# EAGLE board Software Switch Module (EAGLE 7.7.0)
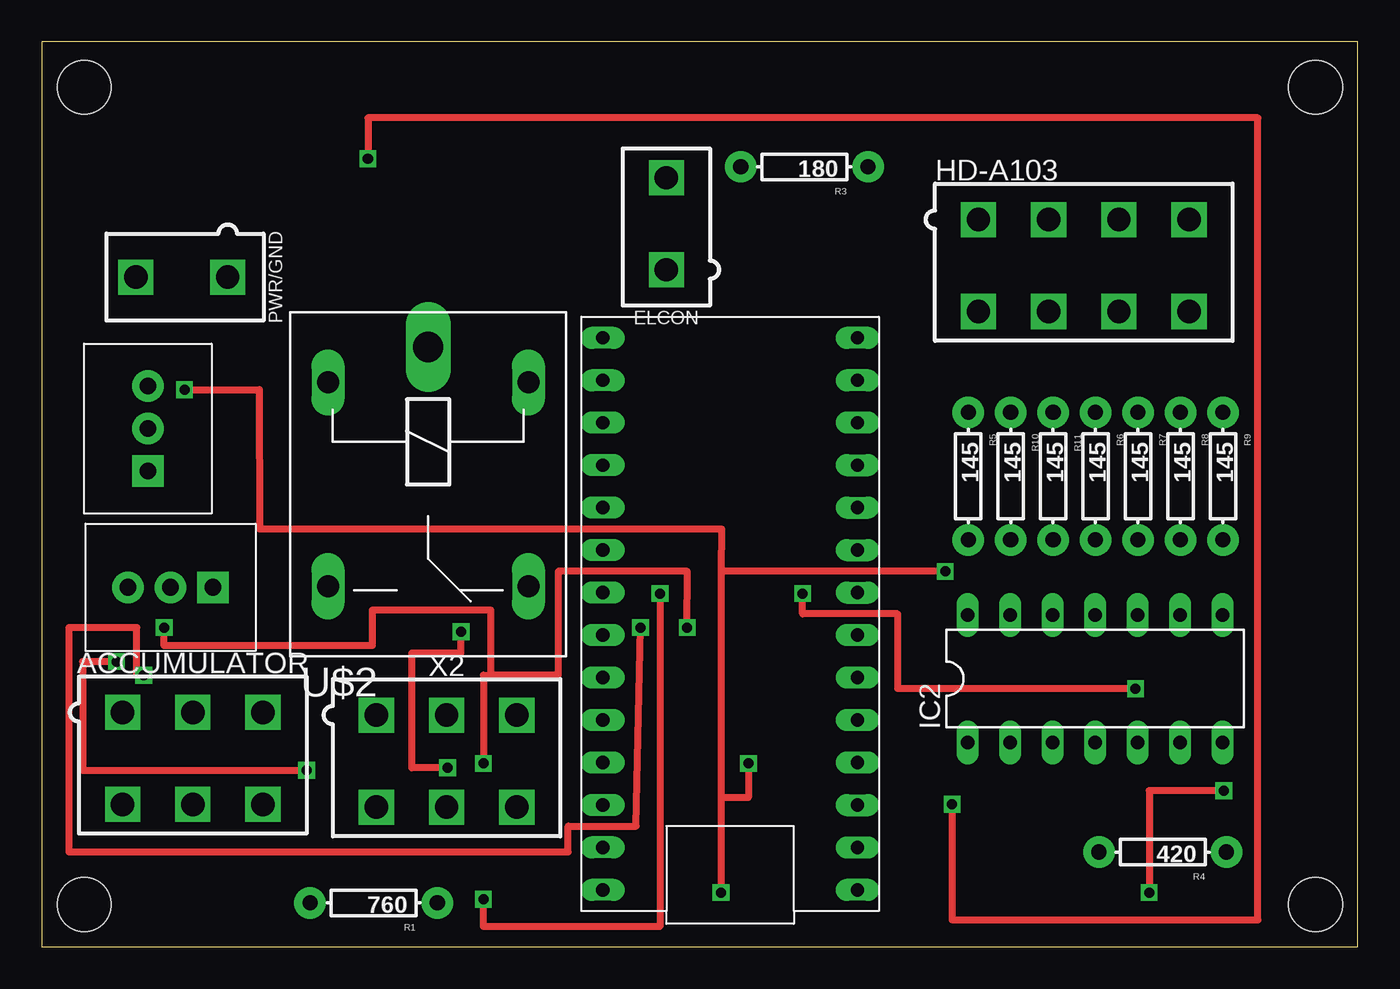
[diagram p0: board, top side]
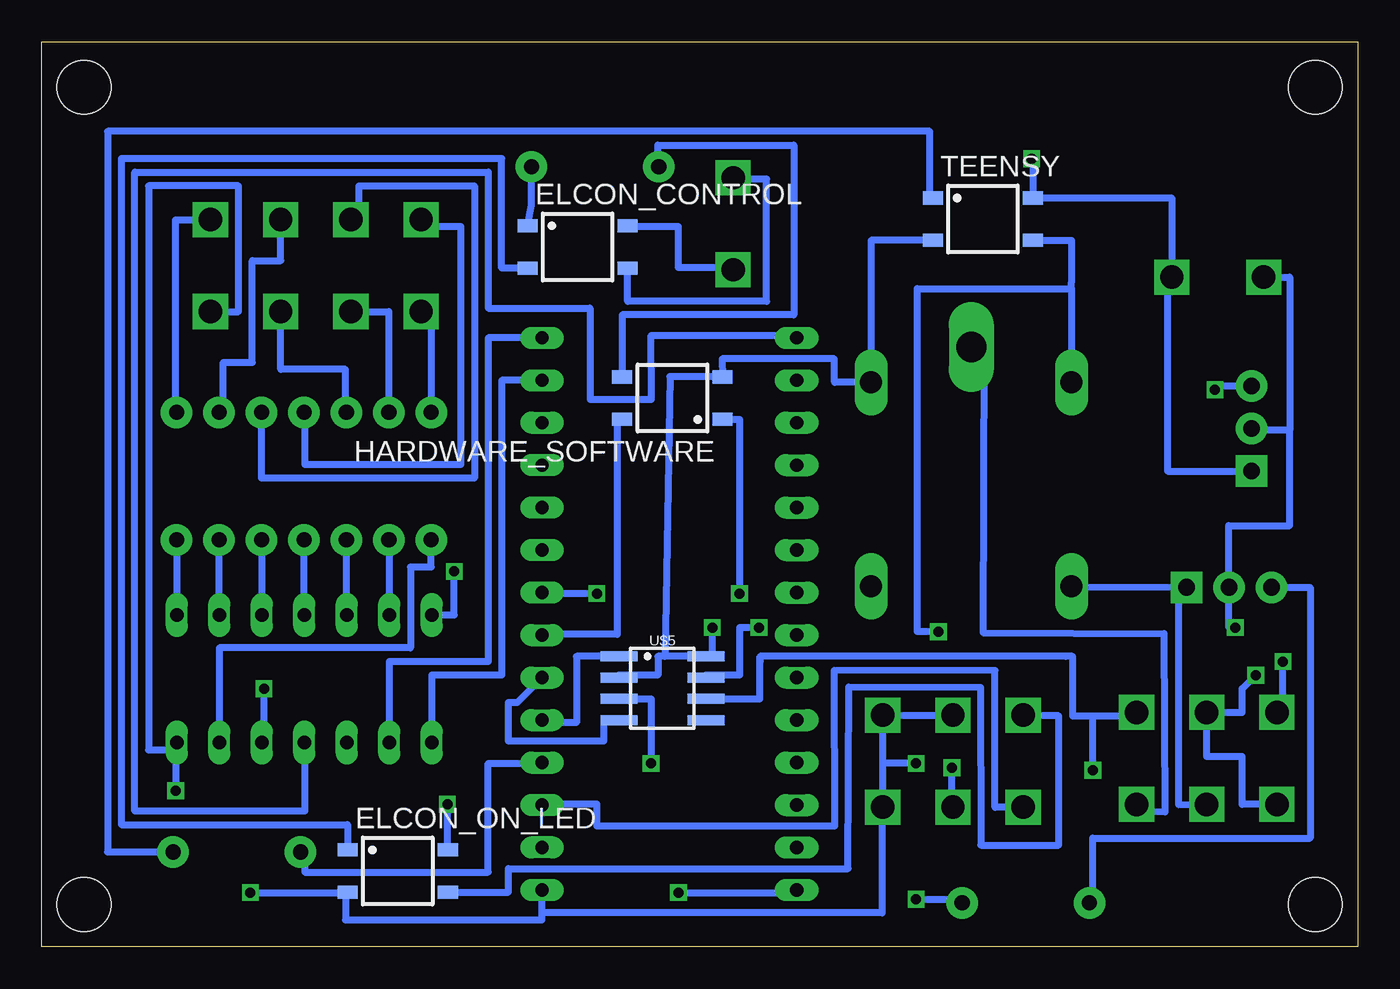
[diagram p1: board, bottom side, seen from below]

Size 78.72 x 54.13 mm. Coordinates in mm from the lower left corner, seen from the top.
Outline: 0,0 78.72,0 78.72,54.13 0,54.13 0,0
Copper layers (1*16): Top 0.035mm / dielectric 1.5mm / Bottom 0.035mm
Design rules "default *": minimum track width 0.00040625mm, minimum drill 24mil, track to track 16mil, track to pad 16mil, pad to pad 16mil, via to via 16mil, smd to smd 8mil, copper to edge 40mil, drill to drill 8mil, minimum pad ring 10mil, minimum via ring 8mil, stop-mask expansion 4mil, vias tented up to drill 0mil, thermal gap 10mil
Holes 3.2 mm at 2.54,2.54 2.54,51.41 76.2,51.41 76.2,2.54

## Footprints (pad centres in the part's own frame; a part is rotated, then mirrored left to right if it is on the bottom)
MINIFIT_5566-6 = drill 1.4 square: 1 4.2,-2.75; 2 0,-2.75; 3 -4.2,-2.75; 4 4.2,2.75; 5 0,2.75; 6 -4.2,2.75
MINIFIT_5566-2 = drill 1.4 square: 1 0,-2.75; 2 0,2.75
SOP04 = smd 0.8 x 1.2: 1 -1.27,-3; 2 1.27,-3; 3 1.27,3; 4 -1.27,3
MINIFIT_5566-8 = drill 1.4 square: 1 6.3,-2.75; 2 2.1,-2.75; 3 -2.1,-2.75; 4 -6.3,-2.75; 5 6.3,2.75; 6 2.1,2.75; 7 -2.1,2.75; 8 -6.3,2.75
TO-220 = drill 1 pad 1.88 square: 1 -2.54,0 | drill 1 pad 1.88: 2 0,0; 3 2.54,0
DIL14 = drill 0.813 long: 1 -7.62,-3.81; 2 -5.08,-3.81; 3 -2.54,-3.81; 4 0,-3.81; 5 2.54,-3.81; 6 5.08,-3.81; 7 7.62,-3.81; 8 7.62,3.81; 9 5.08,3.81; 10 2.54,3.81; 11 0,3.81; 12 -2.54,3.81; 13 -5.08,3.81; 14 -7.62,3.81
AXIAL-0.3 = drill 0.9 pad 1.88: P$1 -3.81,0; P$2 3.81,0
AXIAL-0.3EZ = drill 0.9 pad 1.88: P$1 -3.81,0; P$2 3.81,0
TEENSY_3.2_SIMPLE = drill 0.8 long: 3.3V 16.51,29.21; A0 16.51,3.81; A1 16.51,6.35; A2 16.51,8.89; A3 16.51,11.43; A4 16.51,13.97; A5 16.51,16.51; A6 16.51,19.05; A7 16.51,21.59; A8 16.51,24.13; A9 16.51,26.67; AGND 16.51,31.75; D0(RX1) 1.27,31.75; D1(TX1) 1.27,29.21; D2 1.27,26.67; D3(CANTX) 1.27,24.13; D4(CANRX) 1.27,21.59; D5 1.27,19.05; D6 1.27,16.51; D7(RX3) 1.27,13.97; D8(TX3) 1.27,11.43; D9(RX2) 1.27,8.89; D10(TX2) 1.27,6.35; D11 1.27,3.81; D12 1.27,1.27; D13 16.51,1.27; GND 1.27,34.29; VIN 16.51,34.29
ZF112 = drill 1.321 long: 1 4.064,14.884; 2 4.064,2.896; O 16.256,14.884; S 16.256,2.896 | drill 1.803 long: P 1.956,8.89
SOIC-08 = smd 0.6 x 2.2: 1 -1.905,-2.6; 2 -0.635,-2.6; 3 0.635,-2.6; 4 1.905,-2.6; 5 1.905,2.6; 6 0.635,2.6; 7 -0.635,2.6; 8 -1.905,2.6

## Placement (x,y rotation side)
ACCUMULATOR  CONNECTOR-6  [MINIFIT_5566-6]  9.03,11.28 180 top
ELCON  MINIFIT_5566-2  [MINIFIT_5566-2]  37.36,43.25 0 top
ELCON_CONTROL  CPC1002N  [SOP04]  46.67,41.86 270 bottom
ELCON_ON_LED  CPC1002N  [SOP04]  57.43,4.54 270 bottom
HARDWARE_SOFTWARE  CPC1002N  [SOP04]  41,32.82 90 bottom
HD-A103  MINIFIT_5566-8  [MINIFIT_5566-8]  62.33,40.75 180 top
IC1  [TO-220]  6.34,31 90 top
IC2  74LS49N  [DIL14]  63.02,16.04 0 top
IC3  [TO-220]  7.7,21.5 180 top
PWR/GND  MINIFIT_5566-2  [MINIFIT_5566-2]  8.37,40.05 90 top
R1  760  [AXIAL-0.3]  19.85,2.64 180 top
R3  180  [AXIAL-0.3EZ]  45.62,46.65 180 top
R4  420  [AXIAL-0.3EZ]  67.05,5.68 180 top
R5  145  [AXIAL-0.3EZ]  55.42,28.16 270 top
R6  145  [AXIAL-0.3EZ]  63.04,28.16 270 top
R7  145  [AXIAL-0.3EZ]  65.58,28.16 270 top
R8  145  [AXIAL-0.3EZ]  68.12,28.16 270 top
R9  145  [AXIAL-0.3EZ]  70.66,28.16 270 top
R10  145  [AXIAL-0.3EZ]  57.96,28.16 270 top
R11  145  [AXIAL-0.3EZ]  60.5,28.16 270 top
TEENSY  CPC1002N  [SOP04]  22.42,43.53 270 bottom
U$1  TEENSY_3.2_SIMPLE  [TEENSY_3.2_SIMPLE]  50.07,37.7 180 top
U$2  G5LE  [ZF112]  14.23,37.83 270 top
U$5  MCP2551  [SOIC-08]  41.59,15.47 270 bottom
X2  CONNECTOR-6  [MINIFIT_5566-6]  24.22,11.11 180 top

## Library data of the parts
ACCUMULATOR X2 = HyTechDevices; MPN: 95566-61002; OC_FARNELL: unknown; OC_NEWARK: 22K8620
ELCON PWR/GND = HyTechDevices; OC_FARNELL: 1822072; OC_NEWARK: unknown
ELCON_CONTROL ELCON_ON_LED HARDWARE_SOFTWARE IC1 IC3 R1 R3-R11 TEENSY U$1 U$2 U$5 = HyTechDevices
HD-A103 = HyTechDevices; OC_FARNELL: unknown; OC_NEWARK: unknown
IC2 = 74xx-us

## Nets
+5V: IC1.3 IC2.14 U$1.VIN U$5.3
+12V: ELCON_ON_LED.4 IC1.1 PWR/GND.1 TEENSY.4
AIRS: ACCUMULATOR.5 IC3.1 U$2.S
GND: ELCON_ON_LED.2 HARDWARE_SOFTWARE.2 HD-A103.8 IC1.2 IC2.7 IC3.2 PWR/GND.2 TEENSY.2 U$1.GND U$2.1 U$5.2 U$5.8 X2.2 X2.3 X2.6
N$1: R4.P$1 TEENSY.1
N$2: HARDWARE_SOFTWARE.1 R1.P$1
N$3: HARDWARE_SOFTWARE.4 U$1.D5
N$4: ACCUMULATOR.6 U$2.P
N$5: IC3.3 R1.P$2
N$7: ELCON_CONTROL.1 R3.P$1
N$8: ELCON.1 ELCON_CONTROL.4
N$9: ELCON.2 ELCON_CONTROL.3
N$11: U$1.D1(TX1) X2.4
N$15: U$1.D4(CANRX) U$5.4
N$16: R4.P$2 U$1.D2
N$18: U$1.D3(CANTX) U$5.1
N$19: ACCUMULATOR.1 ACCUMULATOR.3 U$5.6
N$20: TEENSY.3 U$2.2 X2.5
N$21: IC2.11 R6.P$2
N$23: HARDWARE_SOFTWARE.3 R3.P$2
N$28: ELCON_CONTROL.2 ELCON_ON_LED.1
N$30: ELCON_ON_LED.3 X2.1
N$32: IC2.5 U$1.D6
N$33: IC2.1 U$1.D11
N$34: IC2.4 U$1.D13
N$35: IC2.2 U$1.D12
N$36: IC2.10 R7.P$2
N$37: IC2.9 R8.P$2
N$38: IC2.8 R9.P$2
N$39: IC2.13 R10.P$2
N$40: IC2.12 R11.P$2
N$41: IC2.6 R5.P$2
N$42: HD-A103.1 R6.P$1
N$43: ACCUMULATOR.2 ACCUMULATOR.4 U$5.7
N$44: HD-A103.2 R7.P$1
N$45: HD-A103.3 R8.P$1
N$46: HD-A103.4 R9.P$1
N$47: HD-A103.5 R5.P$1
N$48: HD-A103.6 R10.P$1
N$49: HD-A103.7 R11.P$1

## Tracks (layer width: path | path; a pad name or v marks a point on that pad's centre or on a via)
+5V  (via drill 0.6)
  Top 0.406: v42.27,10.97 42.27,8.94 40.64,8.94 | v54.04,22.45 40.63,22.45 | 40.63,22.45 40.64,8.94 | v8.53,33.33 13.01,33.33 13.03,24.99 40.67,24.99 40.63,22.45 | 40.64,8.94 v40.64,3.25
  Bottom 0.406: U$5.3 42.27,14.84 v42.27,10.97 | IC2.14 54.05,19.86 v54.04,22.45 | IC1.3 8.53,33.54 v8.53,33.33 | v40.64,3.25 33.55,3.25 U$1.VIN
+12V  (via drill 0.6)
  Top 0.406: v54.46,8.53 54.46,1.63 72.75,1.63 72.75,49.58 19.51,49.58 v19.51,47.14
  Bottom 0.406: IC1.1 6.34,28.45 11.38,28.45 11.38,40.05 PWR/GND.1 11.12,44.8 TEENSY.4 19.42,47.14 v19.51,47.14 | ELCON_ON_LED.4 54.46,5.81 v54.46,8.53
AIRS
  Bottom 0.406: 10.72,21.48 17.12,21.5 U$2.S | IC3.1 10.72,21.48 | 10.72,21.48 10.72,8.51 ACCUMULATOR.5
GND  (via drill 0.6)
  Top 0.406: v70.71,9.35 66.24,9.35 v66.24,3.25 | v38.61,19.1 38.62,22.45 30.89,22.45 30.89,16.26 26.87,16.26 | v7.32,19.1 7.32,18.03 19.77,18.03 19.77,20.14 26.87,20.14 26.87,16.26 | v26.42,10.97 26.42,16.26 26.87,16.26
  Bottom 0.406: HD-A103.8 66.94,38 66.94,45.52 72.34,45.52 72.34,11.79 70.71,11.79 | IC2.7 70.64,11.79 70.71,11.79 | 28.42,10.97 X2.6 28.45,8.36 28.45,2.03 48.8,2.03 | 28.42,10.97 X2.3 X2.2 | 4.06,30.89 4.06,25.2 7.72,25.2 7.72,21.5 IC3.2 7.7,19.1 v7.32,19.1 | 4.06,30.89 6.34,30.89 IC1.2 | PWR/GND.2 4.06,40.05 4.06,30.89 | TEENSY.2 29.11,42.26 U$2.1 31.29,33.77 31.31,35.16 38.02,35.16 HARDWARE_SOFTWARE.2 41.14,34.1 41.45,17.38 | 41.45,17.38 U$5.8 38.61,17.38 v38.61,19.1 | 41.45,17.38 41.86,17.38 41.86,16.26 44.2,16.26 U$5.2 | 70.71,11.79 v70.71,9.35 | v66.24,3.25 60.43,3.25 ELCON_ON_LED.2 60.55,3.27 60.55,1.63 48.8,1.63 48.8,2.03 | v26.42,10.97 28.42,10.97 | 48.8,2.03 U$1.GND
N$1
  Bottom 0.406: TEENSY.1 25.6,44.8 25.6,48.77 74.78,48.77 74.78,5.68 R4.P$1
N$2  (via drill 0.6)
  Top 0.406: v36.98,21.13 36.98,1.22 26.42,1.22 v26.42,2.85
  Bottom 0.406: HARDWARE_SOFTWARE.1 36.98,31.55 v36.98,21.13 | v26.42,2.85 23.66,2.85 R1.P$1
N$3
  Bottom 0.406: HARDWARE_SOFTWARE.4 44.3,31.55 44.3,18.69 48.8,18.69 U$1.D5
N$4
  Bottom 0.406: U$2.P 22.35,35.87 22.41,18.8 11.59,18.73 11.53,8.06 13.23,8.13 ACCUMULATOR.6
N$5
  Bottom 0.406: IC3.3 2.85,21.5 2.85,6.5 15.85,6.5 15.85,2.64 R1.P$2
N$7
  Bottom 0.406: ELCON_CONTROL.1 49.43,44.35 R3.P$1
N$8
  Bottom 0.406: ELCON.1 37.36,40.64 40.64,40.64 40.64,43.08 43.67,43.08 ELCON_CONTROL.4
N$9
  Bottom 0.406: ELCON_CONTROL.3 43.67,38.61 35.36,38.61 35.36,45.92 37.36,45.92 ELCON.2
N$11
  Bottom 0.406: X2.4 21.7,8.35 21.69,16.52 31.32,16.54 31.29,7.22 45.52,7.22 45.52,8.53 48.8,8.53 U$1.D1(TX1)
N$15
  Bottom 0.406: U$5.4 45.11,13.57 45.11,12.3 50.8,12.3 50.8,14.63 50.27,14.63 U$1.D4(CANRX) 48.8,16.26
N$16
  Bottom 0.406: R4.P$2 62.99,5.68 62.99,4.47 52.02,4.47 52.02,10.97 48.8,10.97 U$1.D2
N$18
  Bottom 0.406: U$5.1 46.74,17.38 46.74,13.41 48.8,13.41 U$1.D3(CANTX)
N$19  (via drill 0.6)
  Top 0.406: v4.47,17.07 2.44,17.07 2.44,10.57 v15.85,10.57
  Bottom 0.406: U$5.6 35.76,14.84 35.75,17.07 | 35.75,17.07 35.75,17.38 | 15.85,13.82 17.07,13.82 17.06,17.38 17.48,17.38 35.75,17.38 35.75,17.07 | 15.85,13.82 13.23,13.82 ACCUMULATOR.3 | ACCUMULATOR.1 4.47,14.03 v4.47,17.07 | v15.85,10.57 15.85,13.82
N$20  (via drill 0.6)
  Top 0.406: v24.28,10.72 22.14,10.72 22.14,17.58 25.07,17.58 v25.07,18.85
  Bottom 0.406: TEENSY.3 17.12,42.26 17.12,39.76 17.12,39.36 | 17.12,39.36 U$2.2 | X2.5 24.28,8.36 v24.28,10.72 | v25.07,18.85 26.34,18.85 26.34,39.36 17.12,39.36
N$21
  Bottom 0.406: IC2.11 63.04,19.86 R6.P$2
N$23
  Bottom 0.406: HARDWARE_SOFTWARE.3 44,37.8 33.73,37.8 33.73,47.95 41.86,47.95 41.86,47.87 R3.P$2
N$28
  Bottom 0.406: ELCON_CONTROL.2 51.21,40.59 51.21,47.14 73.97,47.14 73.97,7.32 60.43,7.32 ELCON_ON_LED.1
N$30
  Bottom 0.406: ELCON_ON_LED.3 50.8,3.27 50.81,4.68 30.49,4.68 30.44,15.55 22.56,15.53 22.55,6.08 17.88,6.1 17.88,13.82 20.02,13.82 X2.1
N$32  (via drill 0.6)
  Top 0.406: v65.43,15.44 51.21,15.44 51.21,19.91 45.52,19.91 v45.52,21.13
  Bottom 0.406: IC2.5 65.43,12.23 v65.43,15.44 | v45.52,21.13 48.8,21.13 U$1.D6
N$33
  Bottom 0.406: U$1.D11 51.21,33.89 51.21,16.26 55.4,16.26 IC2.1
N$34
  Bottom 0.406: IC2.4 62.99,12.23 62.99,8.13 73.15,8.13 73.15,46.33 52.02,46.33 52.02,38.2 45.92,38.2 45.92,32.75 42.26,32.75 42.27,36.58 33.55,36.58 U$1.D13
N$35
  Bottom 0.406: U$1.D12 52.02,36.43 52.02,17.07 57.94,17.07 IC2.2
N$36
  Bottom 0.406: R7.P$2 65.56,24.35 IC2.10
N$37
  Bottom 0.406: IC2.9 68.12,19.86 R8.P$2
N$38
  Bottom 0.406: R9.P$2 70.64,24.35 IC2.8
N$39
  Bottom 0.406: R10.P$2 57.94,24.35 IC2.13
N$40
  Bottom 0.406: IC2.12 60.5,19.86 R11.P$2
N$41
  Bottom 0.406: IC2.6 68.1,17.88 56.67,17.89 56.67,22.73 55.42,22.73 R5.P$2
N$42
  Bottom 0.406: R6.P$1 62.99,31.97 62.99,28.85 53.65,28.85 53.65,43.08 56.03,43.08 HD-A103.1
N$43  (via drill 0.6)
  Top 0.406: v6.1,16.26 5.69,16.26 5.69,19.1 1.63,19.1 1.63,5.69 31.49,5.68 31.48,7.23 35.55,7.23 v35.82,19.1
  Bottom 0.406: ACCUMULATOR.4 6.91,8.53 6.91,11.38 9.03,11.38 ACCUMULATOR.2 6.91,14.03 6.91,15.44 v6.1,16.26 | v35.82,19.1 36.98,19.1 36.98,16.26 38.99,16.26 U$5.7
N$44
  Bottom 0.406: HD-A103.2 59.74,43.5 59.74,45.52 52.83,45.52 52.83,28.04 65.58,28.04 R7.P$1
N$45
  Bottom 0.406: R8.P$1 67.87,31.97 67.87,34.95 66.13,34.95 66.13,41.05 64.43,41.05 HD-A103.3
N$46
  Bottom 0.406: R9.P$1 70.71,31.97 70.71,43.48 68.63,43.48 HD-A103.4
N$47
  Bottom 0.406: HD-A103.5 55.42,38 R5.P$1
N$48
  Bottom 0.406: HD-A103.6 57.96,38 R10.P$1
N$49
  Bottom 0.406: R11.P$1 60.55,31.97 60.55,34.54 64.43,34.54 HD-A103.7